# EAGLE board IJ_1U22HP_board (EAGLE 6.6.0)

Size 109 x 22.7 mm. Coordinates in mm from the lower left corner, seen from the top.
Outline: 0,0 0,22.7 109,22.7 109,0 0,0
Copper layers (1*16): Top 0.035mm / dielectric 1.5mm / Bottom 0.035mm
Design rules "PatternAgents_7mil": minimum track width 7mil, minimum drill 14mil, track to track 7mil, track to pad 7mil, pad to pad 7mil, via to via 7mil, smd to smd 7mil, copper to edge 7mil, drill to drill 7mil, minimum pad ring 12mil, minimum via ring 10mil, stop-mask expansion 4mil, vias tented up to drill 25mil, thermal gap 7mil
Holes 3.2 mm at 6.3,28.15 6.3,-5.5 6.8,28.15 6.8,-5.5 5.8,28.15 5.8,-5.5 102.7,28.15 102.7,-5.5 102.2,28.15 103.7,28.15 101.7,-5.5 104.2,-5.5

## Placement (x,y rotation side)
U$48  BY_CC_SA_TEXTTEXT  [BY_CC_SA_TEXT]  19.88,-16.12 0 top  (outside the outline)

## Library data of the parts
U$48 = PatternAgents-Logos

## Text on the board
tDocu: Tom Moxon